# Altium PCB Main.PcbDoc
Units mil, origin at the board's own origin, x right, y up, seen from the top; angles counter-clockwise.
Board outline 4000 x 7500 mil, 4 copper layers (Top Layer, Gnd 1, Interconnects, Gnd 2), stack 75.4 mil thick; 85 components, 72 nets, 372 pads, 662 vias.
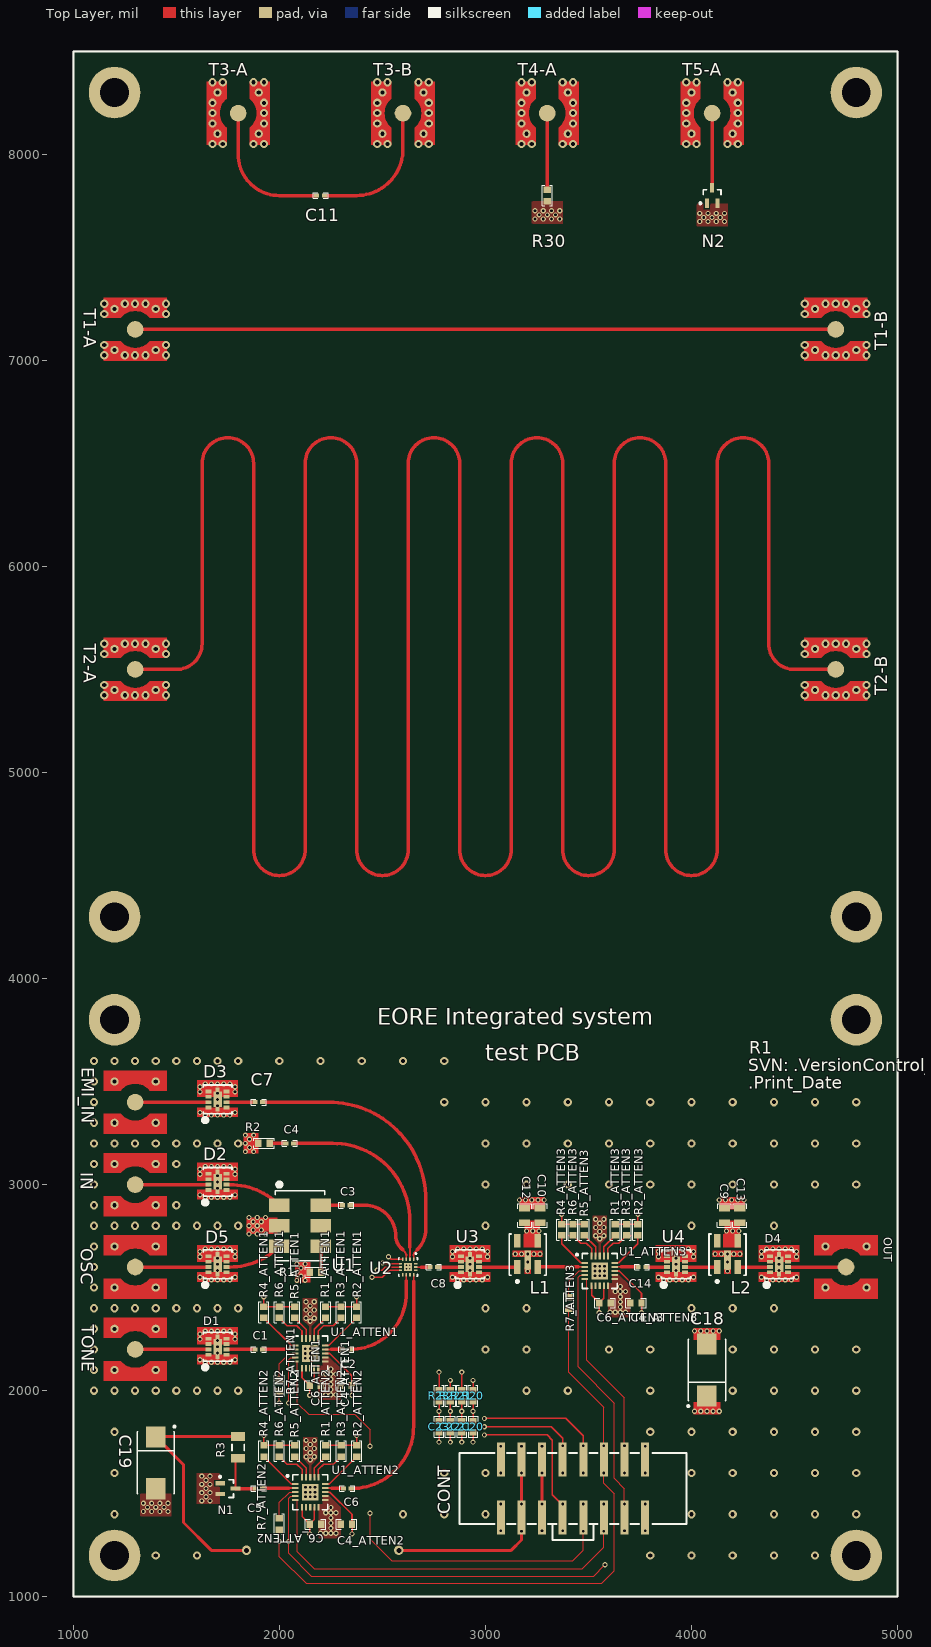
[diagram p0: Top Layer view]
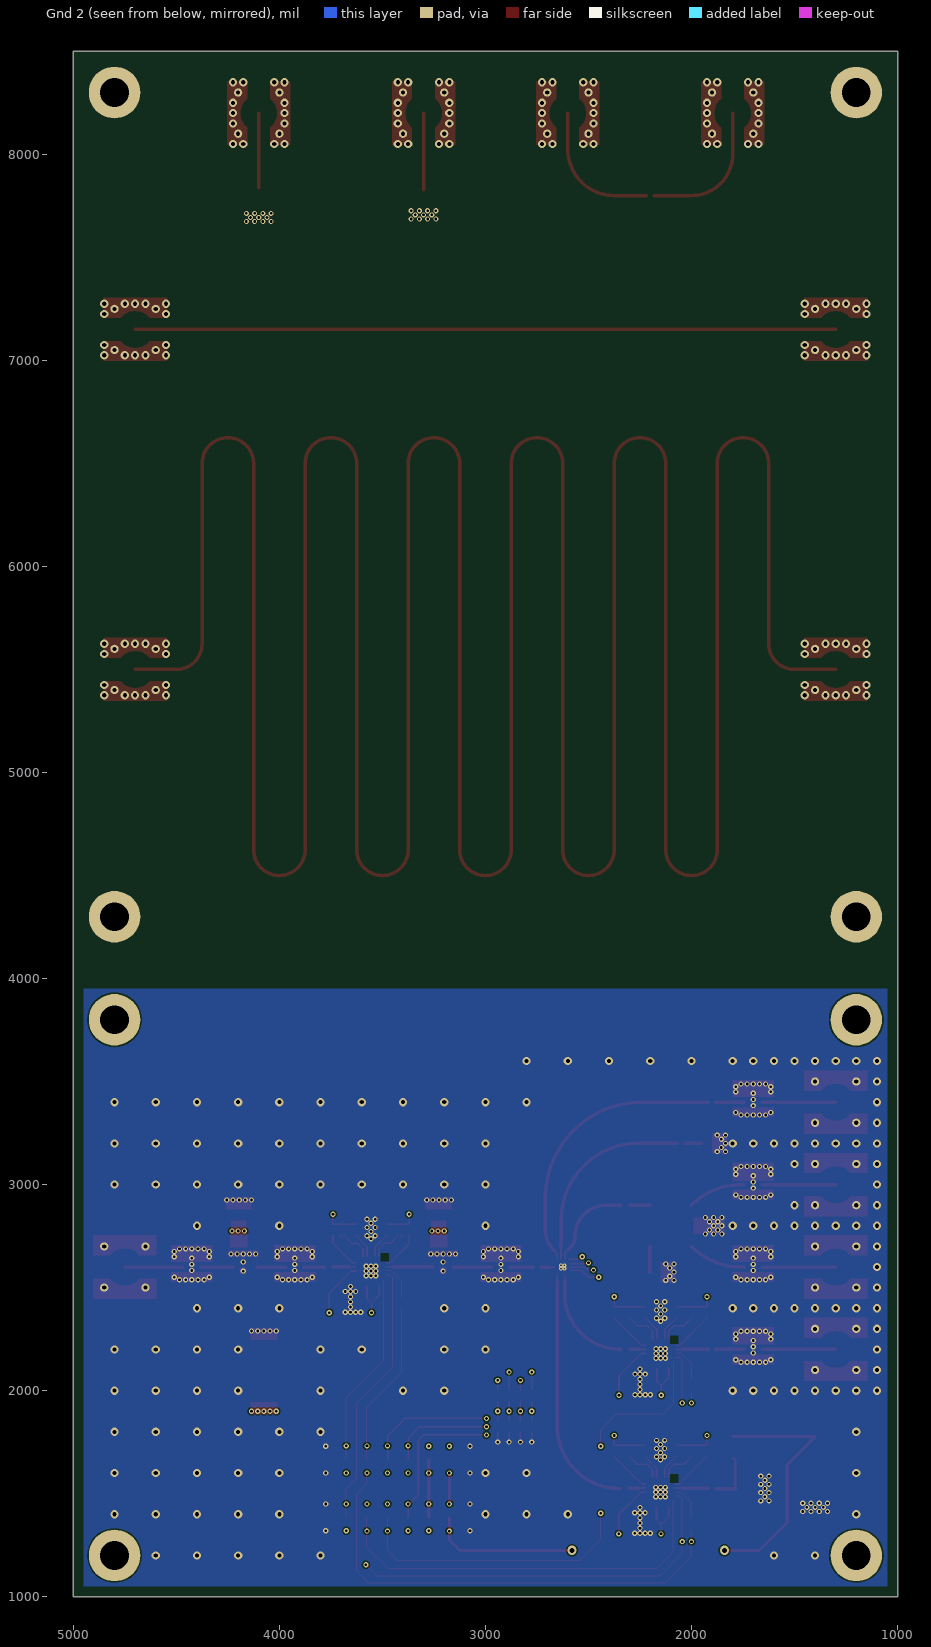
[diagram p1: Gnd 2 view, seen from below]
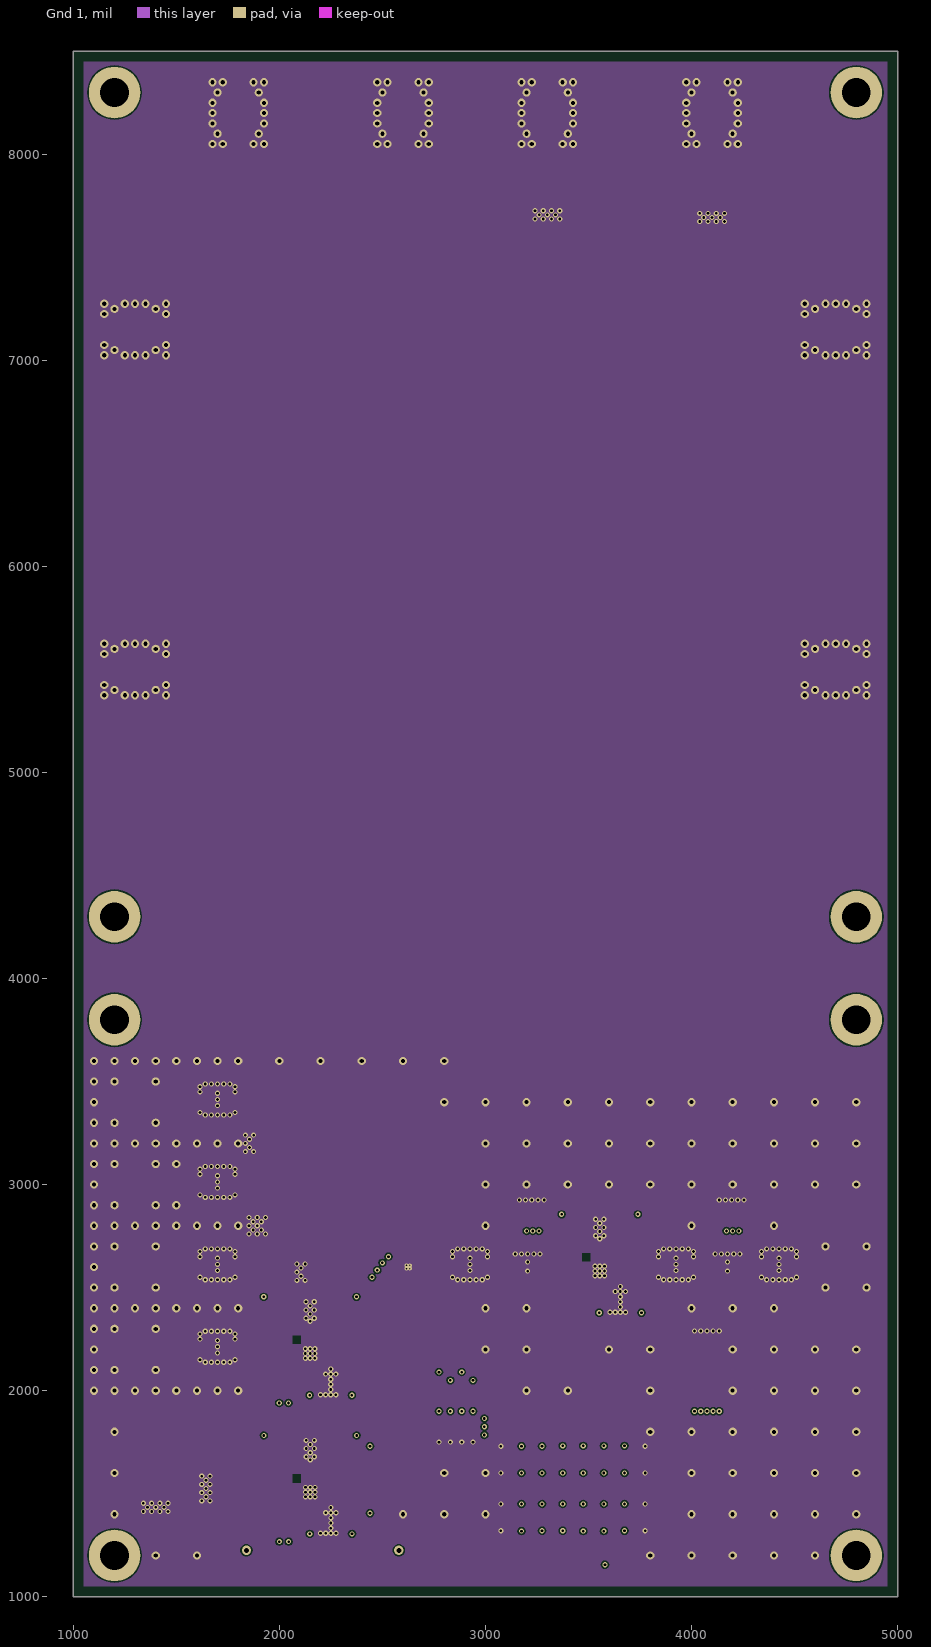
[diagram p2: Gnd 1]
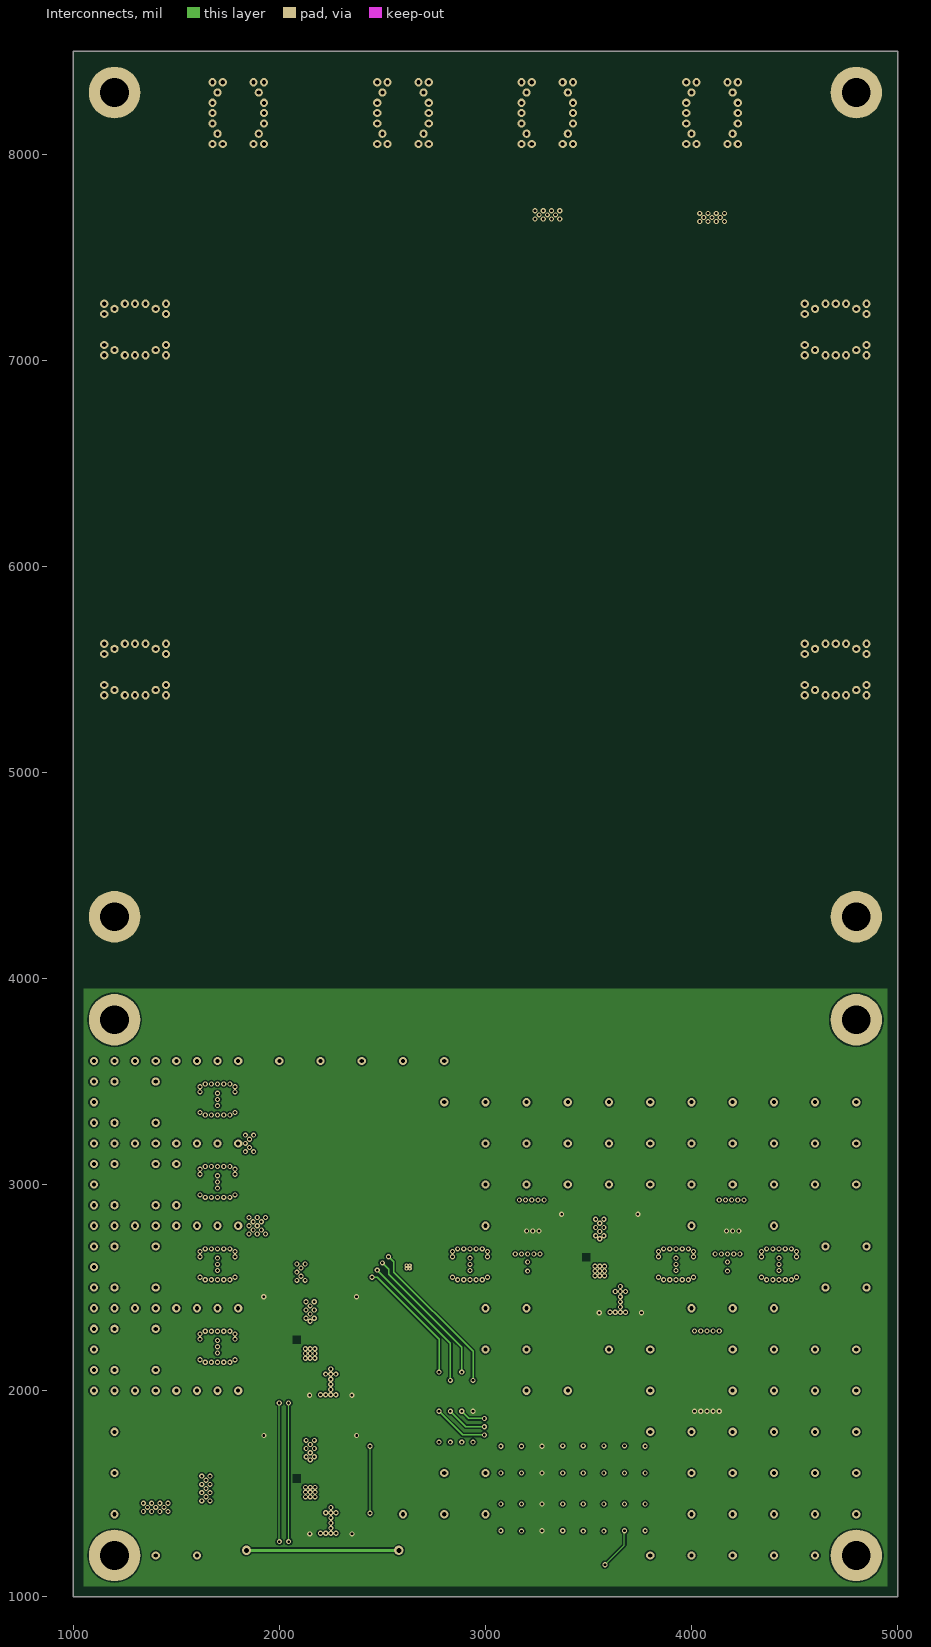
[diagram p3: Interconnects]

## Layer stack, top to bottom
Top Layer: signal copper 1.4
Dielectric: prepreg 10.2, FR-4, Dk 4.56
Gnd 1: signal copper 1.4
Dielectric: core 47, FR-4, Dk 4.8
Interconnects: signal copper 1.4
Dielectric: prepreg 12.6, FR-4, Dk 4.8
Gnd 2: signal copper 1.4

## Board outline
1000,1000 1000,8500 5000,8500 5000,1000

## Design rules (kind name [scope] priority, off if disabled: settings)
Clearance "Clearance Poly" [InPolygon] p1: gap=7
Clearance [All] p2: gap=6
FlightTimeFalling [All] p1: maximum=1.000n
FlightTimeRising [All] p1: maximum=1.000n
HoleSize [All] p1: absolutevalues=TRUE maxlimit=500 minlimit=1 maxpercent=80.000 minpercent=20.000
HoleSize Testpoint [All] p2 off: absolutevalues=TRUE maxlimit=100 minlimit=1 maxpercent=80.000 minpercent=20.000
HoleSize TestPointUsage [All] p3 off: absolutevalues=TRUE maxlimit=100 minlimit=1 maxpercent=80.000 minpercent=20.000
MinimumAnnularRing [All] p1: minimumring=5
MinimumSolderMaskSliver [All] p1 off: minsoldermaskwidth=10
MinimumSolderMaskSliver SilkscreenOverComponentPads [All] p2 off: minsoldermaskwidth=10
OvershootFalling [All] p1: maximum=330.0m
OvershootRising [All] p1: maximum=330.0m
ParallelSegment [All] p1 off: limit=10000 gap=10
PlaneConnect [All] p1: planeconnectstyle=Direct reliefexpansion=20 reliefentries=4 reliefconductorwidth=10 reliefairgap=10
PolygonConnect Heatsink [InNet('GND') vs InNet('GND')] p1: connectstyle=Direct reliefconductorwidth=10 reliefentries=4 polygonreliefangle="90 Angle" airgapwidth=10
PolygonConnect [All] p2: connectstyle=Direct reliefconductorwidth=10 reliefentries=4 polygonreliefangle="90 Angle" airgapwidth=10
RoomDefinition Main [InComponentClass('Main')] p1 off: confinementstyle=ConfineIn formatcopy=TRUE lockcomponents=FALSE outline 6673,10299.02 6673,8328 8457,8328 8457,10299.02
RoomDefinition ATTEN3 [InComponentClass('ATTEN3')] p2: confinementstyle=ConfineIn formatcopy=TRUE lockcomponents=FALSE outline 3330,2333.84 3953.76,2333.84 3953.76,2858.84 3330,2858.84
RoomDefinition ATTEN2 [InComponentClass('ATTEN2')] p3: confinementstyle=ConfineIn formatcopy=TRUE lockcomponents=FALSE outline 1850.02,1260.63 2448.78,1260.63 2448.78,1785.63 1850.02,1785.63
RoomDefinition ATTEN1 [InComponentClass('ATTEN1')] p4: confinementstyle=ConfineIn formatcopy=TRUE lockcomponents=FALSE outline 1849.44,1933.4 2448.2,1933.4 2448.2,2458.4 1849.44,2458.4
RoutingVias [All] p1: holewidth=15 width=30 viastyle="Through Hole" minholewidth=10 minwidth=20 maxholewidth=250 maxwidth=500
SignalStimulus [All] p1: kind=2 level=0 starttime=10.00n stoptime=60.00n periodtime=100.00n
SilkToSilkClearance [All] p1 off: silktosilkclearance=10
SilkToSolderMaskClearance [IsPad] p1 off: minsilkscreentomaskgap=10 clearancetoexposedcopper=TRUE
SolderMaskExpansion [All] p1: expansion=4
SupplyNets [All] p1: voltage=3.300
UndershootFalling [All] p1: maximum=330.0m
UndershootRising [All] p1: maximum=330.0m
Width Width_General [All] p1: maxlimit=250 minlimit=6 preferedwidth=10
Width "Width Differential Pair" [(InDifferentialPairClass('All Differential Pairs'))] p2: maxlimit=26.05 minlimit=1.49 preferedwidth=18.35 toplayer_maxwidth=4.34 toplayer_prefwidth=2.69 midlayer1_minwidth=3.62 midlayer1_maxwidth=7.77 midlayer1_prefwidth=5.4 midlayer2_minwidth=9.66 midlayer2_maxwidth=20.06 midlayer2_prefwidth=14.02 bottomlayer_minwidth=12.79 impedancedriven=TRUE minimp=80.000000 maximp=100.000000 favimp=90.000000
23 further rules are at their usual default settings.

## Classes and differential pairs
component class Main: C1 C2 C3 C4 C5 C6 C7 C8 C9 C10 C11 C12 C13 C14 C18 C19 C20 C21 C22 C23 CONT D1 D2 D3 D4 D5 EMI_IN IN L1 L2 N1 N2 OSC OUT R1 R2 R3 R20 R21 R22 R23 R30 T1-A T1-B T2-A T2-B T3-A T3-B T4-A T5-A TONE U1 U2 U3 U4
component class ATTEN1: C4_ATTEN1 C6_ATTEN1 R1_ATTEN1 R2_ATTEN1 R3_ATTEN1 R4_ATTEN1 R5_ATTEN1 R6_ATTEN1 R7_ATTEN1 U1_ATTEN1
component class ATTEN2: C4_ATTEN2 C6_ATTEN2 R1_ATTEN2 R2_ATTEN2 R3_ATTEN2 R4_ATTEN2 R5_ATTEN2 R6_ATTEN2 R7_ATTEN2 U1_ATTEN2
component class ATTEN3: C4_ATTEN3 C6_ATTEN3 R1_ATTEN3 R2_ATTEN3 R3_ATTEN3 R4_ATTEN3 R5_ATTEN3 R6_ATTEN3 R7_ATTEN3 U1_ATTEN3
channel class Attenuator: ATTEN1 ATTEN2 ATTEN3

## Components (designator, comment, footprint, x,y, rotation, side; value= is the part's Value field where it differs from the comment)
C1 "Cap" 0402C#1 1900,2200 r0 top
C2 "Cap" 0402C#1 2325,2200 r0 top
C3 "Cap" 0402C#1 2325,2900 r0 top
C4 "Cap" 0402C#1 2050,3200 r0 top
C4_ATTEN1 "SMT Cap" 0603C 2324.44,2025 r0 top (schematic designator C4)
C4_ATTEN2 "SMT Cap" 0603C 2325.02,1352.23 r0 top (schematic designator C4)
C4_ATTEN3 "SMT Cap" 0603C 3730,2425.44 r0 top (schematic designator C4)
C5 "Cap" 0402C#1 1900,1525 r0 top
C6 "Cap" 0402C#1 2330,1525 r0 top
C6_ATTEN1 "SMT Cap" 0603C 2174.44,2025 r180 top (schematic designator C6)
C6_ATTEN2 "SMT Cap" 0603C 2175.02,1352.23 r180 top (schematic designator C6)
C6_ATTEN3 "SMT Cap" 0603C 3580,2425.44 r180 top (schematic designator C6)
C7 "Cap" 0402C#1 1900,3400 r0 top
C8 "Cap" 0402C#1 2750,2600 r0 top
C9 "Cap" 0805C 4160,2850 r270 top
C10 "Cap" 0805C 3265,2850 r270 top
C11 "Cap" 0402C#2 2200,7800 r0 top
C12 "Cap" 0805C 3190,2850 r270 top
C13 "Cap" 0805C 4235,2850 r270 top
C14 "Cap" 0402C#1 3760,2600 r0 top
C18 "SMT Cap" V 4075,2100 r90 top
C19 "SMT Cap" V 1400,1650 r270 top
C20 "SMT Cap" 0603C 2940,1825 r90 top
C21 "SMT Cap" 0603C 2885,1825 r90 top
C22 "SMT Cap" 0603C 2830,1825 r90 top
C23 "SMT Cap" 0603C 2775,1825 r90 top
CONT "Header 8X2" "SMT 16-pin rectangular header" 3425,1525 r0 top
D1 "CLM-83-2W" DL1721 1700,2213 r0 top
D2 "CLM-83-2W" DL1721 1700,3013 r0 top
D3 "CLM-83-2W" DL1721 1700,3413 r0 top
D4 "CLM-83-2W" DL1721 4425,2613 r0 top
D5 "CLM-83-2W" DL1721 1700,2613 r0 top
EMI_IN "COAX-M" "SMT RA SMA Connector"#1 1300,3400 r90 top
IN "COAX-M" "SMT RA SMA Connector"#1 1300,3000 r270 top
L1 "TCBT-14" GU1414 3205,2600 r0 top
L2 "TCBT-14" GU1414 4175,2600 r0 top
N1 "NC303SOT" SOT323-3AN#1 1750,1525 r0 top
N2 "NC303SOT" SOT323-3AN#2 4100,7800 r90 top
OSC "COAX-M" "SMT RA SMA Connector"#1 1300,2600 r90 top
OUT "COAX-M" "SMT RA SMA Connector"#1 4750,2600 r270 top
R1 "FC0603-50BFCT-ND" 0603R#1 2175,2575 r0 top
R1_ATTEN1 "RES Semi" 0603R#1 2224.43,2380.33 r90 top (schematic designator R1)
R1_ATTEN2 "RES Semi" 0603R#1 2225,1707.56 r90 top (schematic designator R1)
R1_ATTEN3 "RES Semi" 0603R#1 3629.98,2780.77 r90 top (schematic designator R1)
R2 "FC0603-50BFCT-ND" 0603R#1 1925,3200 r0 top
R2_ATTEN1 "RES Semi" 0603R#1 2374.43,2380.33 r90 top (schematic designator R2)
R2_ATTEN2 "RES Semi" 0603R#1 2375,1707.56 r90 top (schematic designator R2)
R2_ATTEN3 "RES Semi" 0603R#1 3739.98,2780.77 r90 top (schematic designator R2)
R3 "Res Semi Small" 1206R 1800,1725 r90 top
R3_ATTEN1 "RES Semi" 0603R#1 2299.43,2380.33 r90 top (schematic designator R3)
R3_ATTEN2 "RES Semi" 0603R#1 2300,1707.56 r90 top (schematic designator R3)
R3_ATTEN3 "RES Semi" 0603R#1 3684.98,2780.77 r90 top (schematic designator R3)
R4_ATTEN1 "RES Semi" 0603R#1 1924.43,2380.33 r90 top (schematic designator R4)
R4_ATTEN2 "RES Semi" 0603R#1 1925,1707.56 r90 top (schematic designator R4)
R4_ATTEN3 "RES Semi" 0603R#1 3369.98,2780.77 r90 top (schematic designator R4)
R5_ATTEN1 "RES Semi" 0603R#1 2074.43,2380.33 r90 top (schematic designator R5)
R5_ATTEN2 "RES Semi" 0603R#1 2075,1707.56 r90 top (schematic designator R5)
R5_ATTEN3 "RES Semi" 0603R#1 3479.98,2780.77 r90 top (schematic designator R5)
R6_ATTEN1 "RES Semi" 0603R#1 1999.43,2380.33 r90 top (schematic designator R6)
R6_ATTEN2 "RES Semi" 0603R#1 2000,1707.56 r90 top (schematic designator R6)
R6_ATTEN3 "RES Semi" 0603R#1 3424.98,2780.77 r90 top (schematic designator R6)
R7_ATTEN1 "RES Semi" 0603R#1 1999.44,2025 r270 top (schematic designator R7)
R7_ATTEN2 "RES Semi" 0603R#1 2000.02,1352.23 r270 top (schematic designator R7)
R7_ATTEN3 "RES Semi" 0603R#1 3405,2425.44 r270 top (schematic designator R7)
R20 "RES Semi" 0603R#1 2940,1975 r270 top
R21 "RES Semi" 0603R#1 2885,1975 r270 top
R22 "RES Semi" 0603R#1 2830,1975 r270 top
R23 "RES Semi" 0603R#1 2775,1975 r270 top
R30 "FC0603-50BFCT-ND" 0603R#2 3300,7800 r90 top
T1-A "COAX-M" "SMT RA SMA Connector"#2 1300,7150 r90 top
T1-B "COAX-M" "SMT RA SMA Connector"#2 4700,7150 r90 top
T2-A "COAX-M" "SMT RA SMA Connector"#2 1300,5500 r90 top
T2-B "COAX-M" "SMT RA SMA Connector"#2 4700,5500 r90 top
T3-A "COAX-M" "SMT RA SMA Connector"#2 1800,8200 r0 top
T3-B "COAX-M" "SMT RA SMA Connector"#2 2600,8200 r0 top
T4-A "COAX-M" "SMT RA SMA Connector"#2 3300,8200 r0 top
T5-A "COAX-M" "SMT RA SMA Connector"#2 4100,8200 r0 top
TONE "COAX-M" "SMT RA SMA Connector"#1 1300,2200 r270 top
U1 "ADC-10-4" CD542 2100,2800 r270 top
U1_ATTEN1 "DAT-31R5-SP" QFN50P400X400X90_HS-21N 2149.43,2180.33 r0 top (schematic designator U1)
U1_ATTEN2 "DAT-31R5-SP" QFN50P400X400X90_HS-21N 2150,1507.56 r0 top (schematic designator U1)
U1_ATTEN3 "DAT-31R5-SP" QFN50P400X400X90_HS-21N 3554.98,2580.77 r0 top (schematic designator U1)
U2 "SP6T RF Switch" MT1817 2625,2600 r270 top
U3 "CMA-5043" DL1721 2925,2613 r0 top
U4 "CMA-5043" DL1721 3925,2613 r0 top

## Footprints (in the part's own frame and the unit in brackets; to place one, negate y for a bottom-side part, rotate by r counter-clockwise, add the part's x,y. Pads: shape width x height; smd on the part's side, far side on the other; paste and mask are expansions set on the pad)
0402C#1 [mil]
  rect 25x20 smd: 1(-19.02,0) 2(19.02,0)
  silkscreen extent -36,-14 36,14, body extent -36,-14 36,14
0402C#2 [mil]
  rect 25x20 smd paste-100: 1(-19.02,0) 2(19.02,0)
  silkscreen extent -36,-14 36,14, body extent -36,-14 36,14
0603C [mm] "0603 Size Capacitor"
  rect 0.8x0.9 smd: 1(-0.7,0) 2(0.7,0)
  silkscreen extent -1.27,-0.61 1.27,0.61, body extent -0.87,-0.48 0.87,0.48, height 1.3
0603R#1 [mm]
  rect 0.8x0.9 smd: 1(-0.7,0) 2(0.7,0)
  silkscreen extent -1.27,-0.61 1.27,0.61, body extent -0.87,-0.48 0.87,0.48, height 1.3
0603R#2 [mm]
  rect 0.8x0.9 smd paste-2.54: 1(-0.7,0) 2(0.7,0)
  silkscreen extent -1.27,-0.61 1.27,0.61, body extent -0.87,-0.48 0.87,0.48, height 1.3
0805C [mm]
  rect 0.8x1.4 smd: 1(-0.9,0) 2(0.9,0)
  silkscreen extent -1.45,-0.86 1.47,0.86, body extent -1.1,-0.72 1.1,0.72, height 1.4
1206R [mm] "1206 Chip Resistor"
  rect 1.1x1.7 smd: 1(-1.35,0) 2(1.35,0)
  silkscreen extent -0.4,-0.75 0.4,0.75, body extent -1.7,-0.9 1.7,0.9, height 1.3
CD542 [mm] "Mini-Circuits CD542 Package"
  rect 1.65x2.54 smd paste-0.1: 1(-2.54,-2.54) 2(0,-2.54) 3(2.54,-2.54) 4(2.54,2.54) 5(0,2.54) 6(-2.54,2.54)
  silkscreen extent -5.33,-3.05 4.32,3.05, body extent -3.94,-2.79 3.94,2.79, height 3
DL1721 [mm] "DL1721 Mini-Circuits Device Pachage"
  rect 0.76x0.46 smd paste-0.1: 1(-1.11,-0.99) 2(-1.11,-0.33) 3(-1.11,0.33) 4(-1.11,0.99) 5(1.11,0.99) 6(1.11,0.33) 7(1.11,-0.33) 8(1.11,-0.99)
  rect 1.04x1.91 smd paste-0.1: 9(0,0)
  rect 0.46x3 smd paste-0.1: 10(0,0)
  silkscreen extent -1.78,-2.79 1.78,1.78, body extent -1.5,-1.5 1.5,1.5, height 1.14
GU1414 [mil] "Mini-Circuits GU1414 Case"
  rect 32x66 smd paste-3.94: 1(-50,0) 2(50,0) 3(50,127) 4(-50,127)
  rect 32x90 smd paste-3.94: 5(0,34)
  Top Layer region: -16,-33 16,-33 16,-2 -16,-2
  Top Layer region: -73,48 73,48 73,79 -73,79
  Top Layer region: -21,94 65,94 65,160 -21,160
  silkscreen extent -90,-75 90,160, body extent -75,-25 75,150, height 150
MT1817 [mm] "Mini-Circuits MT1817 Package"
  rect 0.4x0.2 smd: 1(-0.95,0.675) 2(-0.95,0.225) 3(-0.95,-0.225) 4(-0.95,-0.675) 8(0.95,-0.675) 9(0.95,-0.225) 10(0.95,0.225) 11(0.95,0.675)
  rect 0.2x0.4 smd: 5(-0.4,-0.95) 6(0,-0.95) 7(0.4,-0.95) 12(0.4,0.95) 13(0,0.95) 14(-0.4,0.95)
  rect 1x1 smd: 15(0,0)
  silkscreen extent -1.7,-1.15 1.15,1.15, body extent -1,-1 1,1, height 0.55
QFN50P400X400X90_HS-21N [mm] "QFN, 20-Leads, Body 4.00x4.00mm, Pitch 0.50mm, Thermal Pad 2.06x2.06mm, IPC Medium Density"
  rect 0.635x0.635 on Keep-Out paste-0.1: 0(-1.676,1.676)
  rect 0.81x0.25 smd: 1(-1.845,1) 2(-1.845,0.5) 3(-1.845,0) 4(-1.845,-0.5) 5(-1.845,-1) 11(1.845,-1) 12(1.845,-0.5) 13(1.845,0) 14(1.845,0.5) 15(1.845,1)
  rect 0.25x0.81 smd: 6(-1,-1.845) 7(-0.5,-1.845) 8(0,-1.845) 9(0.5,-1.845) 10(1,-1.845) 16(1,1.845) 17(0.5,1.845) 18(0,1.845) 19(-0.5,1.845) 20(-1,1.845)
  rect 2.06x2.06 smd: 21(0,0)
  silkscreen extent -2.93,-2.15 2.15,2.15, body extent -2,-2 2,2, height 0.9
"SMT 16-pin rectangular header" [mil]
  rect 39x164 smd: 1(-350,-141) 2(-350,141) 3(-250,-141) 4(-250,141) 5(-150,-141) 6(-150,141) 7(-50,-141) 8(-50,141) 9(50,-141) 10(50,141) 11(150,-141) 12(150,141) 13(250,-141) 14(250,141) 15(350,-141) 16(350,141)
  silkscreen extent -550,-250 550,173, body extent -550,-173 550,173, height 358
"SMT RA SMA Connector"#1 [mil] "CONSMA002-SMD"
  round 81 smd paste-3.94: 1(0,0)
  round 40 hole 20 paste-3.94: 2(100,100) 3(100,-100) 4(-100,-100) 5(-100,100)
  Top Layer region: -56.5,70.06 -81.19,38.83 -90,0 -81.19,-38.83 -56.5,-70.06 -56.5,-70.06 -56.5,-70.06 -56.5,-153 -153,-153 -153,153 -56.5,153
  Top Layer region: 56.5,-70.06 81.19,-38.83 90,0 81.19,38.83 56.5,70.06 56.5,70.06 56.5,70.06 56.5,153 153,153 153,-153 56.5,-153
"SMT RA SMA Connector"#2 [mil] "CONSMA002-SMD"
  round 81 smd paste-100: 1(0,0)
  round 40 hole 20 paste-3.94: 2(100,100) 3(100,-100) 4(-100,-100) 5(-100,100)
  Top Layer region: 56.5,-70.06 81.19,-38.83 90,0 81.19,38.83 56.5,70.06 56.5,70.06 56.5,70.06 56.5,153 153,153 153,-153 56.5,-153
  Top Layer region: -56.5,70.06 -81.19,38.83 -90,0 -81.19,-38.83 -56.5,-70.06 -56.5,-70.06 -56.5,-70.06 -56.5,-153 -153,-153 -153,153 -56.5,153
SOT323-3AN#1 [mm] "SOT323, 3-Leads, Body 2.0x1.3mm, Pitch 0.65mm, Lead Span 2.1mm, IPC Medium Density"
  rect 1.2x0.5 smd: 1(-0.95,0.65) 2(-0.95,-0.65) 3(0.95,0)
  silkscreen extent -1.07,-1.1 0.7,1.57, body extent -0.7,-1.1 0.7,1.1, height 1
SOT323-3AN#2 [mm] "SOT323, 3-Leads, Body 2.0x1.3mm, Pitch 0.65mm, Lead Span 2.1mm, IPC Medium Density"
  rect 1.2x0.5 smd paste-2.54: 1(-0.95,0.65) 2(-0.95,-0.65) 3(0.95,0)
  silkscreen extent -1.07,-1.1 0.7,1.57, body extent -0.7,-1.1 0.7,1.1, height 1
V [mm] "Capacitor, SM Tantalum; Body 7.3 x 4.3 mm (LxW typ)"
  rect 2.6x2.4 smd: 1(-3.2,0) 2(3.2,0)
  silkscreen extent -4.57,-2.3 3.8,2.42, body extent -3.78,-2.16 3.52,2.14, height 4.15

## Part data
C1 C2 C3 C4 C5 C6 C7 C8 C9 C10 C11 C12 C13 C14: "Capacitor"
C4_ATTEN1 C4_ATTEN2 C4_ATTEN3 C6_ATTEN1 C6_ATTEN2 C6_ATTEN3 C18 C19 C20 C21 C22 C23: library part "Cap - SMT Small"
CONT: "Header, 8-Pin, Dual row"
D1 D2 D3 D4 D5: "+12 to +32 dBm RF Limiter"
EMI_IN IN OSC OUT T1-A T1-B T2-A T2-B T3-A T3-B T4-A T5-A TONE: "RF Coaxial PCB Connector, MMCX; Thru-Hole, Vertical Mount Plug,  50 Ohm Impedance"
L1 L2: "Surface Mount 10 MHz to 10 GHz Bias Tee"
N1 N2: "SMT Noise Diode"
R1 R2 R30: library part "RES Semi"
R1_ATTEN1 R1_ATTEN2 R1_ATTEN3 R2_ATTEN1 R2_ATTEN2 R2_ATTEN3 R3 R3_ATTEN1 R3_ATTEN2 R3_ATTEN3 R4_ATTEN1 R4_ATTEN2 R4_ATTEN3 R5_ATTEN1 R5_ATTEN2 R5_ATTEN3 R6_ATTEN1 R6_ATTEN2 R6_ATTEN3 R7_ATTEN1 R7_ATTEN2 R7_ATTEN3 R20 R21 R22 R23: "Semiconductor Resistor"
U1: "Surface Mount Directional Coupler"
U1_ATTEN1 U1_ATTEN2 U1_ATTEN3: "31.5 dB, 0.5 dB Step 6 Bit, Serial Control Interface, Single Positive Supply Voltage"
U2: library part JSW6-33DR+, "SP6T RF Switch 50? 10 to 2700 MHz"
U3 U4: "Low Noise, High IP3 Monolithic Amplifier"

## Free pads (board coordinates)
  round 250 hole 140: 0(1200,3800) 0(1200,4300) 0(1200,8300) 1(1200,1200) 1(4800,1200) 1(4800,3800) 1(4800,4300) 1(4800,8300)

## Via types
v1: diameter 25, hole 13, Top Layer to Gnd 2, tented both sides, 373 vias
v2: diameter 40, hole 20, Top Layer to Gnd 2, tented both sides, 256 vias
v3: diameter 25, hole 13, Top Layer to Gnd 2, 27 vias
v4: diameter 19.68, hole 7.87, Top Layer to Gnd 2, tented bottom, 4 vias
v5: diameter 45, hole 25, Top Layer to Gnd 2, tented both sides, 2 vias

## Nets (pads, with @x,y where several pads share a name; then routed paths per layer and width w, separated by ;. In a path a pad name is that pad's centre, name@x,y a point inside that pad or via, vN(x,y) a via of type N, cw(c..) or ccw(c..) an arc to the next point about the centre after c; other vN are vias at no path point)
3V3: C4_ATTEN1.2 C4_ATTEN2.2 C4_ATTEN3.2 C6_ATTEN1.2 C6_ATTEN2.2 C6_ATTEN3.2 C9.2 C10.2 C12.2 C13.2 C18.1 C20.2 CONT.5 CONT.6 L1.3 L2.3 R1_ATTEN1.2 R1_ATTEN2.2 R1_ATTEN3.2 R2_ATTEN1.2 R2_ATTEN2.2 R2_ATTEN3.2 R3_ATTEN1.2 R3_ATTEN2.2 R3_ATTEN3.2 R4_ATTEN1.2 R4_ATTEN2.2 R4_ATTEN3.2 R5_ATTEN1.2 R5_ATTEN2.2 R5_ATTEN3.2 R6_ATTEN1.2 R6_ATTEN2.2 R6_ATTEN3.2 R20.2 U1_ATTEN1.6 U1_ATTEN1.9 U1_ATTEN1.13 U1_ATTEN2.6 U1_ATTEN2.9 U1_ATTEN2.13 U1_ATTEN3.6 U1_ATTEN3.9 U1_ATTEN3.13 | length 3001.9
  Top Layer w7: v1(1924.43,2455.33) R4_ATTEN1.2 R6_ATTEN1.2 R5_ATTEN1.2 ; v1(1925,1782.56) R4_ATTEN2.2 R6_ATTEN2.2 R5_ATTEN2.2 ; v1(2146.88,1977.56) C6_ATTEN1.2 ; v1(2147.46,1304.79) C6_ATTEN2.2 ; R1_ATTEN1.2 R3_ATTEN1.2 R2_ATTEN1.2 v1(2374.43,2455.33) ; R1_ATTEN2.2 R3_ATTEN2.2 R2_ATTEN2.2 v1(2375,1782.56) ; v1(2352,1977.56) C4_ATTEN1.2 ; v1(2352.57,1304.79) C4_ATTEN2.2 ; C20.2 v1(2940,1900) R20.2 ; v1(3369.98,2855.77) R4_ATTEN3.2 3404.98,2808.33 R5_ATTEN3.2 ; v1(3552.44,2378) C6_ATTEN3.2 ; R1_ATTEN3.2 3704.98,2808.33 R2_ATTEN3.2 v1(3739.98,2855.77) ; v1(3757.56,2378) C4_ATTEN3.2
  Top Layer w8: U1_ATTEN1.6 2110.06,2061.83 C6_ATTEN1.2 2169.11,2047.23 U1_ATTEN1.9 ; U1_ATTEN2.6 2110.63,1389.05 C6_ATTEN2.2 2169.69,1374.46 U1_ATTEN2.9 ; U1_ATTEN1.13 2244.11,2180.33 2352,2072.44 C4_ATTEN1.2 ; U1_ATTEN2.13 2244.69,1507.56 2352.57,1399.67 C4_ATTEN2.2 ; U1_ATTEN3.6 3515.61,2462.27 C6_ATTEN3.2 3574.67,2447.67 U1_ATTEN3.9 ; U1_ATTEN3.13 3649.67,2580.77 3757.56,2472.88 C4_ATTEN3.2
  Top Layer w15: CONT.5 v1(3275,1450) v1(3275,1600) CONT.6
  other v1: 3275,1320 3275,1730 4015,1900.12 4045,1900.12 4075,1900.12 4105,1900.12 4135,1900.12 3200,2775 3230,2775 3260,2775 4170,2775 4200,2775 4230,2775
15V: C19.1 CONT.3 CONT.4 R3.2 | length 2838.4
  Top Layer w15: R3.2 1402.17,1778.15 C19.1 1535,1640.98 1535,1360 1670,1225 v5(1840,1225) ; v5@2590,1225 3125,1225 3175,1275 CONT.3 ; v1(3175,1450) v1(3175,1600)
  Interconnects w15: v5(1840,1225) v5(2580,1225)
  other v1: 3175,1318 3175,1730
CLOCK_ATTEN1: CONT.13 U1_ATTEN1.4 U1_ATTEN2.4 U1_ATTEN3.4 | length 4327.6
  Top Layer w6: v1(2044.44,1940) 2044.44,2150 2055.09,2160.65 U1_ATTEN1.4 ; U1_ATTEN2.4 2055.66,1487.87 2045.02,1477.23 v1(2045.02,1267.23) 2045.02,1209.98 2155,1100 3525,1100 v1(3580,1155) ; U1_ATTEN3.4 3460.65,2561.09 3450,2550.44 3450,2115 3625,1940 3625,1575 3675,1525 CONT.13
  Interconnects w6: v1@2044.44,1267.23 v1(2044.44,1940) ; v1(3580,1155) 3675,1250 v1(3675,1320)
  other v1: 3675,1450
DATA_ATTEN1: CONT.12 R7_ATTEN1.2 R7_ATTEN2.2 R7_ATTEN3.2 | length 3861.6
  Top Layer w6: v1(1999.44,1940) R7_ATTEN1.2 ; R7_ATTEN2.2 v1(2000.02,1267.23) 2000.02,1194.98 2130,1065 3565,1065 3625,1125 3625,1500 3575,1550 v1(3575,1600) ; R7_ATTEN3.2 3405,2090 3575,1920 v1(3575,1732) CONT.12
  Interconnects w6: v1@1999.44,1267.23 v1(1999.44,1940)
GND: C4_ATTEN1.1 C4_ATTEN2.1 C4_ATTEN3.1 C6_ATTEN1.1 C6_ATTEN2.1 C6_ATTEN3.1 C9.1 C10.1 C12.1 C13.1 C18.2 C19.2 C20.1 C21.1 C22.1 C23.1 CONT.1 CONT.2 CONT.15 CONT.16 D1.1 D1.3 D1.4 D1.5 D1.6 D1.8 D1.9 D1.10 D2.1 D2.3 D2.4 D2.5 D2.6 D2.8 D2.9 D2.10 D3.1 D3.3 D3.4 D3.5 D3.6 D3.8 D3.9 D3.10 D4.1 D4.3 D4.4 D4.5 D4.6 D4.8 D4.9 D4.10 D5.1 D5.3 D5.4 D5.5 D5.6 D5.8 D5.9 D5.10 EMI_IN.2 EMI_IN.3 EMI_IN.4 EMI_IN.5 IN.2 IN.3 IN.4 IN.5 L1.5 L2.5 N1.2 N2.2 OSC.2 OSC.3 OSC.4 OSC.5 OUT.2 OUT.3 OUT.4 OUT.5 R1.1 R2.1 R30.1 T1-A.2 T1-A.3 T1-A.4 T1-A.5 T1-B.2 T1-B.3 T1-B.4 T1-B.5 T2-A.2 T2-A.3 T2-A.4 T2-A.5 T2-B.2 T2-B.3 T2-B.4 T2-B.5 T3-A.2 T3-A.3 T3-A.4 T3-A.5 T3-B.2 T3-B.3 T3-B.4 T3-B.5 T4-A.2 T4-A.3 T4-A.4 T4-A.5 T5-A.2 T5-A.3 T5-A.4 T5-A.5 TONE.2 TONE.3 TONE.4 TONE.5 U1.2 U1_ATTEN1.10 U1_ATTEN1.11 U1_ATTEN1.12 U1_ATTEN1.18 U1_ATTEN1.21 U1_ATTEN2.10 U1_ATTEN2.11 U1_ATTEN2.12 U1_ATTEN2.18 U1_ATTEN2.21 U1_ATTEN3.10 U1_ATTEN3.11 U1_ATTEN3.12 U1_ATTEN3.18 U1_ATTEN3.21 U2.15 U3.1 U3.3 U3.4 U3.5 U3.6 U3.8 U3.9 U3.10 U4.1 U4.3 U4.4 U4.5 U4.6 U4.8 U4.9 U4.10 | length 189.8
  Top Layer w7: v1(2775,1750) C23.1 ; v1(2830,1750) C22.1 ; v1(2885,1750) C21.1 ; v1(2940,1750) C20.1
  other v1: 2200,1307.56 2225,1307.56 2250,1307.56 2275,1307.56 3075,1320 3775,1320 2250,1332.56 2250,1357.56 2250,1382.56 2225,1407.56 2250,1407.56 2275,1407.56 1340,1413.66 1380,1413.66 1420,1413.66 1460,1413.66 2250,1432.56 1360,1433.66 1400,1433.66 1440,1433.66 3075,1450 3775,1450 1340,1453.66 1380,1453.66 1420,1453.66 1460,1453.66 1623.66,1465 1663.66,1465 1643.66,1485 1623.66,1505 1663.66,1505 1643.66,1525 1623.66,1545 1663.66,1545 1643.66,1565 1623.66,1585 1663.66,1585 3075,1600 3775,1600 2150,1663.86 2130,1678.86 2170,1678.86 2150,1698.86 2130,1718.86 2170,1718.86 3075,1730 3775,1730 2150,1738.86 2130,1758.86 2170,1758.86 2199.43,1980.33 2224.43,1980.33 2249.43,1980.33 2274.43,1980.33 2249.43,2005.33 2249.43,2030.33 2249.43,2055.33 2224.43,2080.33 2249.43,2080.33 2274.43,2080.33 2249.43,2105.33 1640,2138 1670,2138 1700,2138 1730,2138 1760,2138 1615,2150 1785,2150 1700,2183 1700,2213 1700,2243 1615,2250 1785,2250 1615,2275 1785,2275 1640,2288 1670,2288 1700,2288 1730,2288 1760,2288 4015,2289.88 4045,2289.88 4075,2289.88 4105,2289.88 4135,2289.88 2149.43,2336.63 2129.43,2351.63 2169.43,2351.63 2149.43,2371.63 3604.98,2380.77 3629.98,2380.77 3654.98,2380.77 3679.98,2380.77 2129.43,2391.63 2169.43,2391.63 3654.98,2405.77 2149.43,2411.63 3654.98,2430.77 2129.43,2431.63 2169.43,2431.63 3654.98,2455.77 3629.98,2480.77 3654.98,2480.77 3679.98,2480.77 3654.98,2505.77 2085,2535 2125,2535 1640,2538 1670,2538 1700,2538 1730,2538 1760,2538 2865,2538 2895,2538 2925,2538 2955,2538 2985,2538 3865,2538 3895,2538 3925,2538 3955,2538 3985,2538 4365,2538 4395,2538 4425,2538 4455,2538 4485,2538 1615,2550 1785,2550 2840,2550 3010,2550 3840,2550 4010,2550 4340,2550 4510,2550 2105,2555 2085,2575 3205,2580 4175,2580 1700,2583 2925,2583 3925,2583 4425,2583 2105,2595 1700,2613 2925,2613 3925,2613 4425,2613 2085,2615 2125,2615 3205,2624 4175,2624 1700,2643 2925,2643 3925,2643 4425,2643 1615,2650 1785,2650 2840,2650 3010,2650 3840,2650 4010,2650 4340,2650 4510,2650 3145,2663 3175,2663 3205,2663 3235,2663 3265,2663 4115,2663 4145,2663 4175,2663 4205,2663 4235,2663 1615,2675 1785,2675 2840,2675 3010,2675 3840,2675 4010,2675 4340,2675 4510,2675 1640,2688 1670,2688 1700,2688 1730,2688 1760,2688 2865,2688 2895,2688 2925,2688 2955,2688 2985,2688 3865,2688 3895,2688 3925,2688 3955,2688 3985,2688 4365,2688 4395,2688 4425,2688 4455,2688 4485,2688 3554.98,2737.07 3534.98,2752.07 3574.98,2752.07 1852.56,2760 1892.56,2760 1932.56,2760 3554.98,2772.07 1872.56,2780 1912.56,2780 3534.98,2792.07 3574.98,2792.07 1852.56,2800 1892.56,2800 3554.98,2812.07 1872.56,2820 1912.56,2820 3534.98,2832.07 3574.98,2832.07 1852.56,2840 1892.56,2840 1932.56,2840 3165,2925 3195,2925 3225,2925 3255,2925 3285,2925 4135,2925 4165,2925 4195,2925 4225,2925 4255,2925 1640,2938 1670,2938 1700,2938 1730,2938 1760,2938 1615,2950 1785,2950 1700,2983 1700,3013 1700,3043 1615,3050 1785,3050 1615,3075 1785,3075 1640,3088 1670,3088 1700,3088 1730,3088 1760,3088 1835,3160 1875,3160 1855,3180 1835,3200 1855,3220 1835,3240 1875,3240 1640,3338 1670,3338 1700,3338 1730,3338 1760,3338 1615,3350 1785,3350 1700,3383 1700,3413 1700,3443 1615,3450 1785,3450 1615,3475 1785,3475 1640,3488 1670,3488 1700,3488 1730,3488 1760,3488 4040,7673.66 4080,7673.66 4120,7673.66 4160,7673.66 3240.59,7686.06 3280.59,7686.06 3320.59,7686.06 3360.59,7686.06 4060,7693.66 4100,7693.66 4140,7693.66 3260.59,7706.06 3300.59,7706.06 3340.59,7706.06 4040,7713.66 4080,7713.66 4120,7713.66 4160,7713.66 3240.59,7726.06 3280.59,7726.06 3320.59,7726.06 3360.59,7726.06
  other v2: 1400,1200 1600,1200 3800,1200 4000,1200 4200,1200 4400,1200 4600,1200 1200,1400 2600,1400 2800,1400 3000,1400 4000,1400 4200,1400 4400,1400 4600,1400 4800,1400 1200,1600 2800,1600 3000,1600 4000,1600 4200,1600 4400,1600 4600,1600 4800,1600 1200,1800 3800,1800 4000,1800 4200,1800 4400,1800 4600,1800 4800,1800 1100,2000 1200,2000 1300,2000 1400,2000 1500,2000 1600,2000 1700,2000 1800,2000 3200,2000 3400,2000 3800,2000 4200,2000 4400,2000 4600,2000 4800,2000 1100,2100 1100,2200 3000,2200 3200,2200 3600,2200 3800,2200 4200,2200 4400,2200 4600,2200 4800,2200 1100,2300 1100,2400 1200,2400 1300,2400 1400,2400 1500,2400 1600,2400 1700,2400 1800,2400 3000,2400 3200,2400 4000,2400 4200,2400 4400,2400 1100,2500 1100,2600 1100,2700 1100,2800 1200,2800 1300,2800 1400,2800 1500,2800 1600,2800 1700,2800 1800,2800 3000,2800 4000,2800 4400,2800 1100,2900 1500,2900 1100,3000 3000,3000 3200,3000 3400,3000 3600,3000 3800,3000 4000,3000 4200,3000 4400,3000 4600,3000 4800,3000 1100,3100 1500,3100 1100,3200 1200,3200 1300,3200 1400,3200 1500,3200 1600,3200 1700,3200 1800,3200 3000,3200 3200,3200 3400,3200 3600,3200 3800,3200 4000,3200 4200,3200 4400,3200 4600,3200 4800,3200 1100,3300 1100,3400 2800,3400 3000,3400 3200,3400 3400,3400 3600,3400 3800,3400 4000,3400 4200,3400 4400,3400 4600,3400 4800,3400 1100,3500 1100,3600 1200,3600 1300,3600 1400,3600 1500,3600 1600,3600 1700,3600 1800,3600 2000,3600 2200,3600 2400,3600 2600,3600 2800,3600 1150,5375 1250,5375 1300,5375 1350,5375 1450,5375 4550,5375 4650,5375 4700,5375 4750,5375 4850,5375 1150,5425 1450,5425 4550,5425 4850,5425 1150,5575 1450,5575 4550,5575 4850,5575 1150,5625 1250,5625 1300,5625 1350,5625 1450,5625 4550,5625 4650,5625 4700,5625 4750,5625 4850,5625 1150,7025 1250,7025 1300,7025 1350,7025 1450,7025 4550,7025 4650,7025 4700,7025 4750,7025 4850,7025 1150,7075 1450,7075 4550,7075 4850,7075 1150,7225 1450,7225 4550,7225 4850,7225 1150,7275 1250,7275 1300,7275 1350,7275 1450,7275 4550,7275 4650,7275 4700,7275 4750,7275 4850,7275 1675,8050 1725,8050 1875,8050 1925,8050 2475,8050 2525,8050 2675,8050 2725,8050 3175,8050 3225,8050 3375,8050 3425,8050 3975,8050 4025,8050 4175,8050 4225,8050 1675,8150 1925,8150 2475,8150 2725,8150 3175,8150 3425,8150 3975,8150 4225,8150 1675,8200 1925,8200 2475,8200 2725,8200 3175,8200 3425,8200 3975,8200 4225,8200 1675,8250 1925,8250 2475,8250 2725,8250 3175,8250 3425,8250 3975,8250 4225,8250 1675,8350 1725,8350 1875,8350 1925,8350 2475,8350 2525,8350 2675,8350 2725,8350 3175,8350 3225,8350 3375,8350 3425,8350 3975,8350 4025,8350 4175,8350 4225,8350
  other v3: 2127,1484.56 2150,1484.56 2173,1484.56 2127,1507.56 2150,1507.56 2173,1507.56 2127,1530.56 2150,1530.56 2173,1530.56 2126.43,2157.33 2149.43,2157.33 2172.43,2157.33 2126.43,2180.33 2149.43,2180.33 2172.43,2180.33 2126.43,2203.33 2149.43,2203.33 2172.43,2203.33 3531.98,2557.77 3554.98,2557.77 3577.98,2557.77 3531.98,2580.77 3554.98,2580.77 3577.98,2580.77 3531.98,2603.77 3554.98,2603.77 3577.98,2603.77
  other v4: 2617.13,2592.13 2632.87,2592.13 2617.13,2607.87 2632.87,2607.87
IN1: C23.2 CONT.7 R23.2 | length 1099.6
  Top Layer w7: C23.2 v1(2775,1900) R23.2 ; v1(2995,1785) 3300,1785 3325,1760 3325,1495 3375,1445 CONT.7
  Interconnects w7: v1(2775,1900) 2890,1785 v1(2995,1785)
  other v1: 3375,1320 3375,1450
IN2: C22.2 CONT.8 R22.2 | length 797.7
  Top Layer w7: C22.2 v1(2830,1900) R22.2 ; v1(2995,1825) 3320,1825 3375,1770 CONT.8
  Interconnects w7: v1(2830,1900) 2905,1825 v1(2995,1825)
  other v1: 3375,1600 3375,1732
IN3: C21.2 CONT.10 R21.2 | length 848.6
  Top Layer w7: C21.2 v1(2885,1900) R21.2 ; v1(2995,1865) 3390,1865 3475,1780 CONT.10
  Interconnects w7: v1(2885,1900) 2920,1865 v1(2995,1865)
  other v1: 3475,1600 3475,1732
LATCH_ATTEN1: CONT.9 U1_ATTEN1.5 | length 2396.2
  Top Layer w6: U1_ATTEN1.5@2086.79,2140.96 2086.79,1940 2141.79,1885 2365,1885 2440,1810 v1(2440,1730) ; v1(2440,1405) 2440,1280 2545,1175 3425,1175 3475,1225 CONT.9
  Interconnects w6: v1(2440,1405) v1(2440,1730)
  other v1: 3475,1318 3475,1450
LATCH_ATTEN2: CONT.11 U1_ATTEN2.5 | length 1959.9
  Top Layer w6: U1_ATTEN2.5@2087.36,1468.19 2087.36,1217.64 2170,1135 3470,1135 3575,1240 CONT.11
  other v1: 3575,1318 3575,1450
LATCH_ATTEN3: CONT.14 U1_ATTEN3.5 | length 951.1
  Top Layer w6: U1_ATTEN3.5@3492.35,2541.4 3492.35,2147.65 3675,1965 v1(3675,1732) CONT.14
  other v1: 3675,1600
NetC1_1: C1.1 D1.7 | length 137.3
  Top Layer w17: D1.7 C1.1
NetC2_2: C2.2 U2.9 | length 517.9
  Top Layer w7: 2616.14,2533.86 U2.9
  Top Layer w17: C2.2 ccw(c2344.02,2472.13) 2616.14,2472.13 2616.14,2533.86
NetC3_1: C3.1 U1.6 | length 100
  Top Layer w17: U1.6 C3.1@2300,2900
NetC3_2: C3.2 U2.3 | length 435.8
  Top Layer w7: U2.3 2616.14,2655
  Top Layer w10: 2597.72,2685 2607.96,2674.76 cw(c2588.2,2655) 2616.14,2655
  Top Layer w17: C3.2 2415,2900 cw(c2415,2750) 2565,2750 ccw(c2642.94,2750) 2587.83,2694.89 2597.72,2685
NetC4_1: C4.1 R2.2 | length 78.4
  Top Layer w17: R2.2 C4.1
NetC4_2: C4.2 U2.2 | length 966.3
  Top Layer w7: U2.2 2633.86,2655
  Top Layer w10: 2633.86,2655 2633.86,2695
  Top Layer w17: C4.2 2260,3200 cw(c2260,2827.38) 2632.62,2827.38 2632.62,2735.18 cw(c2133.86,2700) 2633.86,2700 2633.86,2695
NetC5_1: C5.1 N1.3 R3.1 | length 247.6
  Top Layer w10: N1.3 1787.4,1659.25 cw(c1800,1659.25) R3.1
  Top Layer w17: N1.3 C5.1
NetC6_2: C6.2 U2.11 | length 1210.3
  Top Layer w7: 2651.57,2530 U2.11
  Top Layer w17: C6.2 ccw(c2349.02,1827.56) 2651.57,1827.56 2651.57,2530
NetC7_1: C7.1 D3.7 | length 137.3
  Top Layer w17: D3.7 C7.1
NetC7_2: C7.2 U2.1 | length 1369
  Top Layer w7: U2.1 2651.57,2655
  Top Layer w10: 2651.57,2655 cw(c2679.52,2655) 2659.76,2674.76 2670,2685
  Top Layer w17: C7.2 2240,3400 cw(c2240,2930) 2710,2930 2710,2781.57 cw(c2573.43,2781.57) 2670,2685
NetC8_1: C8.1 U2.13 | length 68.6
  Top Layer w7: U2.13 2687.99,2600
  Top Layer w17: 2687.99,2600 C8.1
NetC8_2: C8.2 U3.2 | length 112.3
  Top Layer w17: C8.2 U3.2
NetC11_1: C11.1 T3-A.1 | length 695.1
  Top Layer w17: T3-A.1 1800,8000 ccw(c2000,8000) 2000,7800 C11.1
NetC11_2: C11.2 T3-B.1 | length 684.4
  Top Layer w17: C11.2 2375,7800 ccw(c2375,8025) 2600,8025 T3-B.1
NetC14_2: C14.2 U4.2 | length 101.3
  Top Layer w17: C14.2@3780,2600.01 U4.2
NetD1_2: D1.2 TONE.1 | length 356.3
  Top Layer w17: TONE.1 D1.2
NetD2_2: D2.2 IN.1 | length 356.3
  Top Layer w17: IN.1 D2.2
NetD2_7: D2.7 U1.1 | length 283
  Top Layer w13.96: D2.7 D2.7@1758.56,3000.01
  Top Layer w17: D2.7@1758.56,3000.01 cw(c1758.56,2658.56) U1.1
NetD3_2: D3.2 EMI_IN.1 | length 356.3
  Top Layer w17: EMI_IN.1 D3.2
NetD4_2: D4.2 L2.2 | length 156.3
  Top Layer w17: L2.2 D4.2
NetD4_7: D4.7 OUT.1 | length 281.3
  Top Layer w17: D4.7 OUT.1
NetD5_2: D5.2 OSC.1 | length 356.3
  Top Layer w17: OSC.1 D5.2
NetD5_7: D5.7 U1.3 | length 283
  Top Layer w13.96: D5.7 D5.7@1758.6,2600.01
  Top Layer w17: D5.7@1758.6,2600.01 ccw(c1758.6,2941.4) 1852.52,2613.18 ccw(c1758.6,2941.4) U1.3
NetL1_1: L1.1 U3.7 | length 186.3
  Top Layer w17: U3.7 L1.1
NetL2_1: L2.1 U4.7 | length 141.3
  Top Layer w17: U4.7 L2.1@4110,2600
NetN2_3: N2.3 T5-A.1 | length 362.6
  Top Layer w17: N2.3 T5-A.1
NetR1_2: R1.2 U1.4 | length 125.7
  Top Layer w17: U1.4 cw(c2193.82,2693.82) 2202.56,2693.82 R1.2
NetR1_ATTEN1_1: R1_ATTEN1.1 U1_ATTEN1.17 | length 122.7
  Top Layer w8: U1_ATTEN1.17 2169.11,2297.46 R1_ATTEN1.1
NetR1_ATTEN2_1: R1_ATTEN2.1 U1_ATTEN2.17 | length 122.7
  Top Layer w8: U1_ATTEN2.17 2169.69,1624.69 R1_ATTEN2.1
NetR1_ATTEN3_1: R1_ATTEN3.1 U1_ATTEN3.17 | length 122.7
  Top Layer w8: U1_ATTEN3.17 3574.67,2697.9 R1_ATTEN3.1
NetR2_ATTEN1_1: R2_ATTEN1.1 U1_ATTEN1.15 | length 207.5
  Top Layer w8: U1_ATTEN1.15 2241.35,2219.7 R2_ATTEN1.1
NetR2_ATTEN2_1: R2_ATTEN2.1 U1_ATTEN2.15 | length 207.5
  Top Layer w8: U1_ATTEN2.15 2241.93,1546.93 R2_ATTEN2.1
NetR2_ATTEN3_1: R2_ATTEN3.1 U1_ATTEN3.15 | length 190.9
  Top Layer w8: U1_ATTEN3.15 3646.91,2620.14 3739.98,2713.21 R2_ATTEN3.1
NetR3_ATTEN1_1: R3_ATTEN1.1 U1_ATTEN1.16 | length 173.5
  Top Layer w8: U1_ATTEN1.16 2188.8,2289.7 2214.43,2315.33 2261.98,2315.33 R3_ATTEN1.1
NetR3_ATTEN2_1: R3_ATTEN2.1 U1_ATTEN2.16 | length 173.5
  Top Layer w8: U1_ATTEN2.16 2189.37,1616.93 2215,1642.56 2262.56,1642.56 R3_ATTEN2.1
NetR3_ATTEN3_1: R3_ATTEN3.1 U1_ATTEN3.16 | length 167.6
  Top Layer w8: U1_ATTEN3.16 3594.35,2690.14 3619.98,2715.77 3647.54,2715.77 R3_ATTEN3.1 ; R3_ATTEN3.1@3694.98,2743.21 3704.98,2753.21
NetR4_ATTEN1_1: R4_ATTEN1.1 U1_ATTEN1.1 | length 207.5
  Top Layer w8: R4_ATTEN1.1 2057.5,2219.7 U1_ATTEN1.1
NetR4_ATTEN2_1: R4_ATTEN2.1 U1_ATTEN2.1 | length 207.5
  Top Layer w8: R4_ATTEN2.1 2058.07,1546.93 U1_ATTEN2.1
NetR4_ATTEN3_1: R4_ATTEN3.1 U1_ATTEN3.1 | length 190.9
  Top Layer w8: R4_ATTEN3.1 3369.98,2713.21 3463.06,2620.14 U1_ATTEN3.1
NetR5_ATTEN1_1: R5_ATTEN1.1 U1_ATTEN1.19 | length 122.7
  Top Layer w8: R5_ATTEN1.1 2129.74,2297.46 U1_ATTEN1.19
NetR5_ATTEN2_1: R5_ATTEN2.1 U1_ATTEN2.19 | length 122.7
  Top Layer w8: R5_ATTEN2.1 2130.32,1624.68 U1_ATTEN2.19
NetR5_ATTEN3_1: R5_ATTEN3.1 U1_ATTEN3.19 | length 122.7
  Top Layer w8: R5_ATTEN3.1 3535.3,2697.9 U1_ATTEN3.19
NetR6_ATTEN1_1: R6_ATTEN1.1 U1_ATTEN1.20 | length 173.5
  Top Layer w8: R6_ATTEN1.1 2036.87,2315.33 2084.43,2315.33 2110.06,2289.7 U1_ATTEN1.20
NetR6_ATTEN2_1: R6_ATTEN2.1 U1_ATTEN2.20 | length 173.5
  Top Layer w8: R6_ATTEN2.1 2037.44,1642.56 2085,1642.56 2110.63,1616.93 U1_ATTEN2.20
NetR6_ATTEN3_1: R6_ATTEN3.1 U1_ATTEN3.20 | length 167.6
  Top Layer w8: 3404.98,2753.21 R6_ATTEN3.1@3414.98,2743.21 ; R6_ATTEN3.1 3462.43,2715.77 3489.98,2715.77 3515.61,2690.14 U1_ATTEN3.20
NetR7_ATTEN1_1: R7_ATTEN1.1 U1_ATTEN1.3 | length 175.6
  Top Layer w6: R7_ATTEN1.1 1999.44,2130 2049.77,2180.33 U1_ATTEN1.3
NetR7_ATTEN2_1: R7_ATTEN2.1 U1_ATTEN2.3 | length 175.6
  Top Layer w6: R7_ATTEN2.1 2000.02,1457.23 2050.35,1507.56 U1_ATTEN2.3
NetR7_ATTEN3_1: R7_ATTEN3.1 U1_ATTEN3.3 | length 175.6
  Top Layer w6: R7_ATTEN3.1 3405,2530.44 3455.33,2580.77 U1_ATTEN3.3
NetR20_1: R20.1 U2.4 | length 890.9
  Top Layer w7: v1(2530,2650) 2542.6,2637.4 U2.4 ; R20.1 v1(2940,2050)
  Interconnects w7: v1(2530,2650) 2555,2625 2555,2575 2940,2190 v1(2940,2050)
NetR30_2: R30.2 T4-A.1 | length 372.4
  Top Layer w17: R30.2 T4-A.1
NetT1-A_1: T1-A.1 T1-B.1 | length 3400
  Top Layer w17: T1-A.1 T1-B.1
NetT2-A_1: T2-A.1 T2-B.1 | length 25612.4
  Top Layer w17: T2-A.1 1500,5500 ccw(c1500,5625) 1625,5625 1625,6500 cw(c1750,6500) 1750,6625 cw(c1750,6500) 1875,6500 1875,4625 ccw(c2000,4625) 2000,4500 ccw(c2000,4625) 2125,4625 2125,6500 cw(c2250,6500) 2250,6625 cw(c2250,6500) 2375,6500 2375,4625 ccw(c2500,4625) 2500,4500 ccw(c2500,4625) 2625,4625 2625,6500 cw(c2750,6500) 2750,6625 cw(c2750,6500) 2875,6500 2875,4625 ccw(c3000,4625) 3000,4500 ccw(c3000,4625) 3125,4625 3125,6500 cw(c3250,6500) 3250,6625 cw(c3250,6500) 3375,6500 3375,4625 ccw(c3500,4625) 3500,4500 ccw(c3500,4625) 3625,4625 3625,6500 cw(c3750,6500) 3750,6625 cw(c3750,6500) 3875,6500 3875,4625 ccw(c4000,4625) 4000,4500 ccw(c4000,4625) 4125,4625 4125,6500 cw(c4250,6500) 4250,6625 cw(c4250,6500) 4375,6500 4375,5625 ccw(c4500,5625) 4500,5500 T2-B.1
"RF IN_ATTEN1": C1.2 U1_ATTEN1.2 | length 155.7
  Top Layer w8: 2047.06,2200.02 U1_ATTEN1.2
  Top Layer w17: C1.2@1918.47,2200.02 2044.44,2200.02
"RF IN_ATTEN2": C5.2 U1_ATTEN2.2 | length 155.7
  Top Layer w8: 2047.64,1527.24 U1_ATTEN2.2
  Top Layer w17: C5.2@1919.05,1527.24 2045.02,1527.24
"RF IN_ATTEN3": L1.2 U1_ATTEN3.2 | length 224.7
  Top Layer w8: 3452.62,2600.46 U1_ATTEN3.2
  Top Layer w17: L1.2@3255,2600.46 3450,2600.46
"RF OUT_ATTEN1": C2.1 U1_ATTEN1.14 | length 74.7
  Top Layer w8: U1_ATTEN1.14 2251.79,2200.02
  Top Layer w17: 2251.79,2200.02 C2.1@2296.8,2200.02
"RF OUT_ATTEN2": C6.1 U1_ATTEN2.14 | length 74.7
  Top Layer w8: U1_ATTEN2.14 2252.36,1527.24
  Top Layer w17: 2254.98,1527.24 C6.1@2300,1527.24
"RF OUT_ATTEN3": C14.1 U1_ATTEN3.14 | length 110.7
  Top Layer w8: U1_ATTEN3.14 3657.35,2600.46
  Top Layer w17: 3659.97,2600.46 C14.1@3740.98,2600.46
SW1: R23.1 U2.7 | length 848.5
  Top Layer w7: v1(2450,2550) 2500,2550 2534.25,2584.25 U2.7 ; R23.1 v1(2775,2090)
  Interconnects w7: v1(2450,2550) 2475,2550 2775,2250 v1(2775,2090)
SW2: R22.1 U2.6 | length 848.3
  Top Layer w7: v1(2475,2585) 2500,2585 2515,2600 U2.6 ; R22.1 v1(2830,2050)
  Interconnects w7: v1(2475,2585) 2830,2230 v1(2830,2050)
SW3: R21.1 U2.5 | length 866.3
  Top Layer w7: v1(2500,2620) 2504.25,2615.75 U2.5 ; R21.1 v1(2885,2090)
  Interconnects w7: v1(2500,2620) 2530,2590 2530,2565 2885,2210 v1(2885,2090)
pads on no net: L1.4 L2.4 N1.1 N2.1 U1.5 U1_ATTEN1.0 U1_ATTEN1.7 U1_ATTEN1.8 U1_ATTEN2.0 U1_ATTEN2.7 U1_ATTEN2.8 U1_ATTEN3.0 U1_ATTEN3.7 U1_ATTEN3.8 U2.8 U2.10 U2.12 U2.14

## Polygon pours and split planes (outlines as drawn)
no net on Bottom Solder "Bottom Layer-No Net" (solid): 5000,1000 1000,1000 1000,4000 5000,4000 5000,1000
no net on Top Solder "Bottom Layer-No Net" (solid): 1000,1000 1000,8500 5000,8500 5000,1000
GND on Gnd 2 "Bottom Layer-No Net" (solid, pour order 26): 1050,1050 1050,3950 4950,3950 4950,1050 1050,1050
GND on Top Layer "Bottom Layer-No Net" (solid, pour order 20): 3375.59,7662.4 3375.59,7772.4 3225.59,7772.4 3225.59,7662.4
GND on Top Layer "Bottom Layer-No Net" (solid, pour order 21): 4175,7650 4175,7760 4025,7760 4025,7650
GND on Top Layer "Bottom Layer-No Net" (solid, pour order 19): 1475,1390 1475,1500 1325,1500 1325,1390
GND on Top Layer "Bottom Layer-No Net" (solid, pour order 16): 2297.46,1435.1 2240,1492.56 2210,1492.56 2210,1447.56 2190,1447.56 2190,1282.56 2297.46,1282.56
GND on Top Layer "Bottom Layer-No Net" (solid, pour order 17): 3702.44,2508.32 3644.98,2565.77 3614.98,2565.77 3614.98,2520.77 3594.98,2520.77 3594.98,2355.77 3702.44,2355.77
GND on Top Layer "Bottom Layer-No Net" (solid, pour order 22): 1600,1450 1710,1450 1710,1600 1600,1600
GND on Top Layer "Bottom Layer-No Net" (solid, pour order 25): 2144.43,2246.63 2154.43,2246.63 2154.43,2311.63 2184.43,2341.63 2184.43,2447.77 2114.43,2447.77 2114.43,2341.63 2144.43,2311.63
GND on Top Layer "Bottom Layer-No Net" (solid, pour order 18): 2296.88,2107.87 2239.43,2165.33 2209.43,2165.33 2209.43,2120.33 2189.43,2120.33 2189.43,1955.33 2296.88,1955.33
GND on Top Layer "Bottom Layer-No Net" (solid, pour order 24): 3549.98,2647.07 3559.98,2647.07 3559.98,2712.07 3589.98,2742.07 3589.98,2848.21 3519.98,2848.21 3519.98,2742.07 3549.98,2712.07
GND on Top Layer "Bottom Layer-No Net" (solid, pour order 23): 2145,1573.86 2155,1573.86 2155,1638.86 2185,1668.86 2185,1775 2115,1775 2115,1668.86 2145,1638.86
3V3 on Interconnects "Bottom Layer-No Net" (solid, pour order 27): 1050,1050 4950,1050 4950,3950 1050,3950 1050,1050
GND on Gnd 1 "Bottom Layer-No Net" (solid, pour order 28): 1050,1050 4950,1050 4950,8450 1050,8450 1050,1050

## Other copper
Top Layer:
  rectangle net GND: 4325,2528 4525,2575
  rectangle net GND: 4325,2625 4525,2708
  rectangle net GND: 3825,2528 4025,2575
  rectangle net GND: 3825,2625 4025,2708
  rectangle net GND: 2825,2528 3025,2575
  rectangle net GND: 2825,2625 3025,2708
  rectangle net GND: 1825,3150 1900,3250
  rectangle net GND: 1840,2760 1990,2840
  rectangle net GND: 2075,2525 2150,2625
  rectangle net GND: 1600,2128 1800,2175
  rectangle net GND: 1600,2225 1800,2308
  rectangle net GND: 1600,3328 1800,3375
  rectangle net GND: 1600,3425 1800,3508
  rectangle net GND: 1600,2928 1800,2975
  rectangle net GND: 1600,3018 1800,3108
  rectangle net GND: 1600,2528 1800,2575
  rectangle net GND: 1600,2625 1800,2708
  rectangle net 3V3: 4160,2730 4235,2825
  rectangle net 3V3: 3190,2730 3265,2825
  rectangle net GND: 3165,2880 3290,2940
  rectangle net GND: 4135,2880 4260,2940
  region net 3V3: 4140,1945.12 4010,1945.12 4010,1885.12 4140,1885.12
  rectangle net GND: 4010,2244.88 4140,2304.88

## Silkscreen, mask and mechanical layers (free items; w line width, h text height)
Top Overlay:
  the board outline again, w10
  text "EORE Integrated system" at 2475,3775 h80
  text "R1" at 4280,3635 h60
  text "test PCB" at 3000,3600 h80
  text "SVN:" at 4275,3550 h60
  text ".VersionControl_RevNumber" at 4495,3550 h60
  text ".Print_Date" at 4275,3465 h60
Top Paste:
  lines w10: 1000,1000 1000,4000 5000,4000 5000,1000 1000,1000
Top Solder:
  drawing of 46 lines, arcs and shapes, not listed
Bottom Solder:
  drawing of 71 lines, arcs and shapes, not listed